# Altium PCB 12V_Buck.PcbDoc
Units mm, origin at the board's own origin, x right, y up, seen from the top; angles counter-clockwise.
Board outline 85.09 x 31.11 mm, 4 copper layers (Top Layer, GND, POWER, Bottom Layer), stack 0.603 mm thick; 63 components, 29 nets, 152 pads, 249 vias.
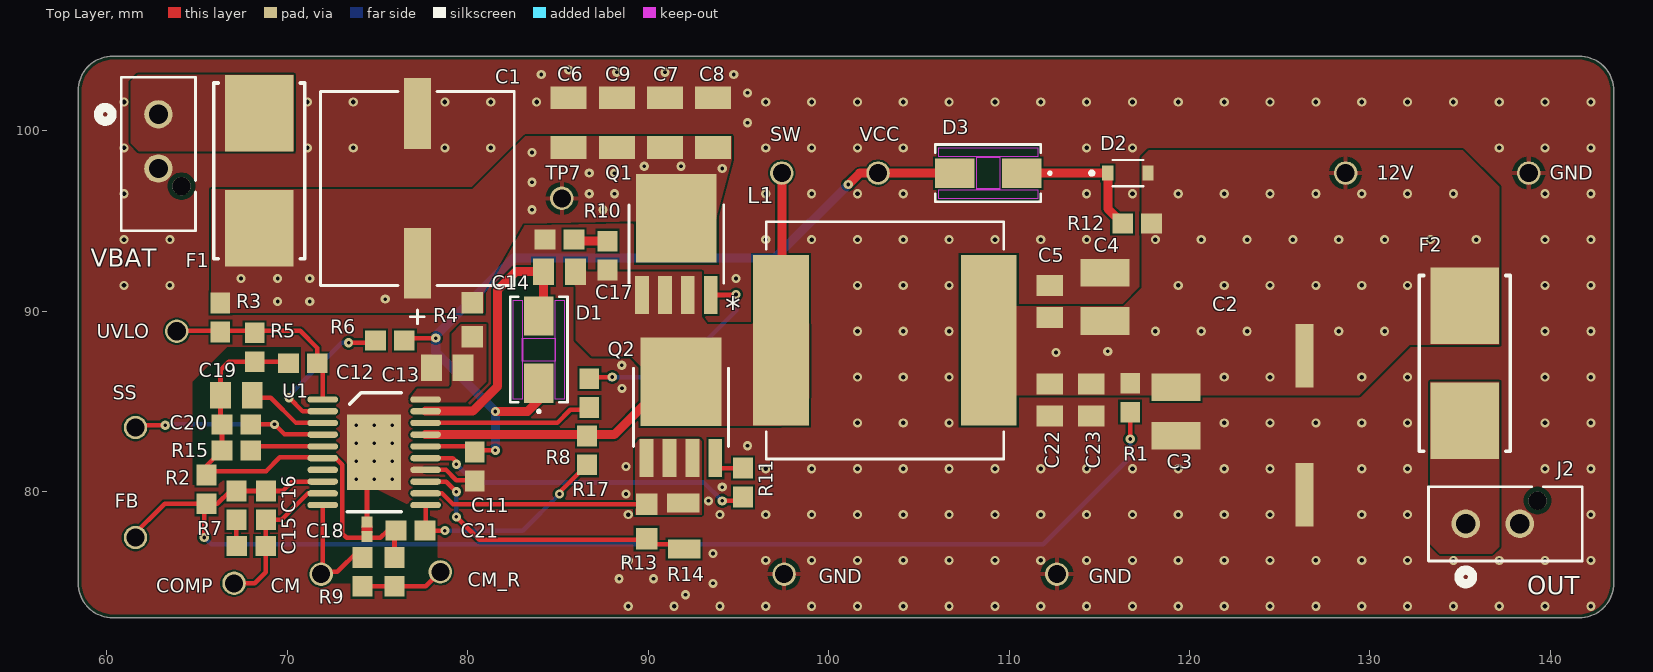
[diagram p0: Top Layer view]
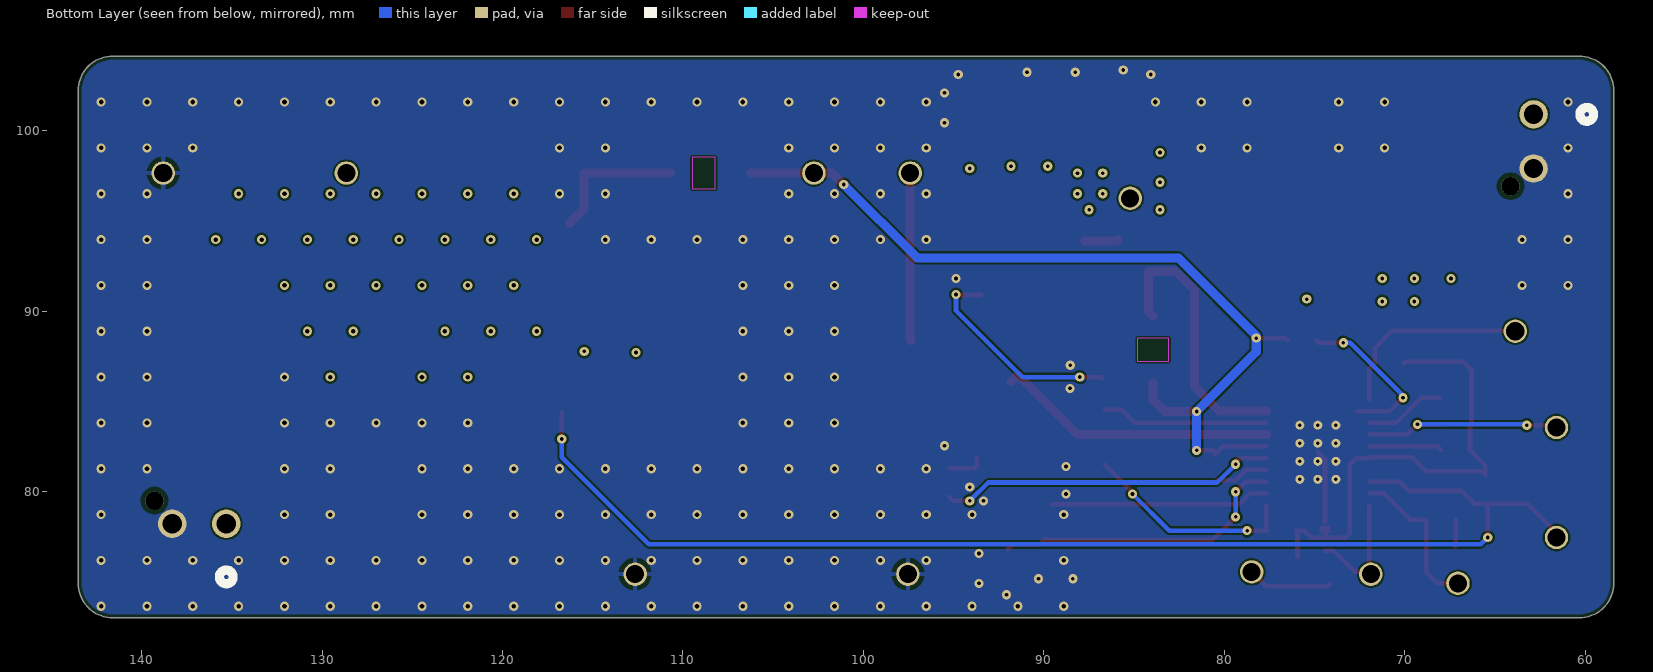
[diagram p1: Bottom Layer view, seen from below]
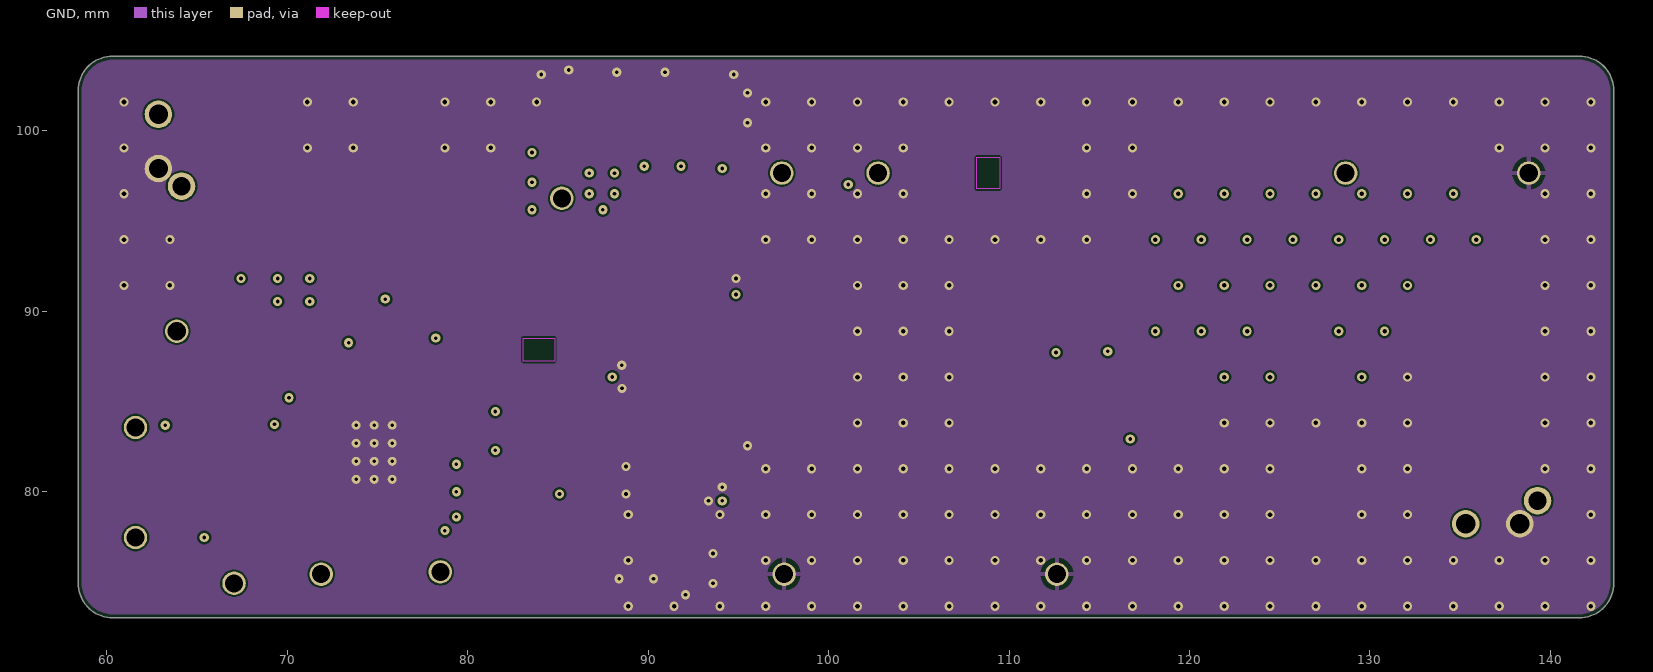
[diagram p2: GND]
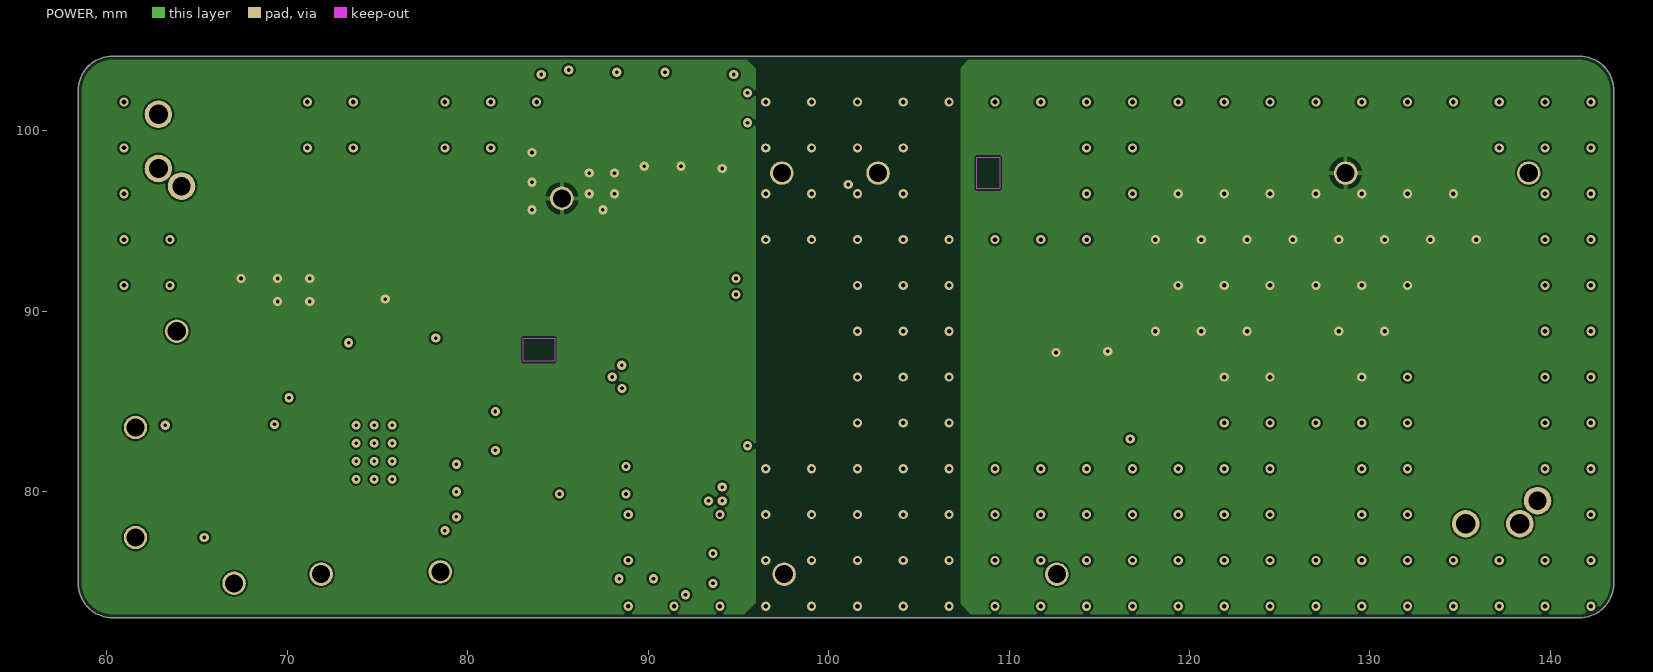
[diagram p3: POWER]
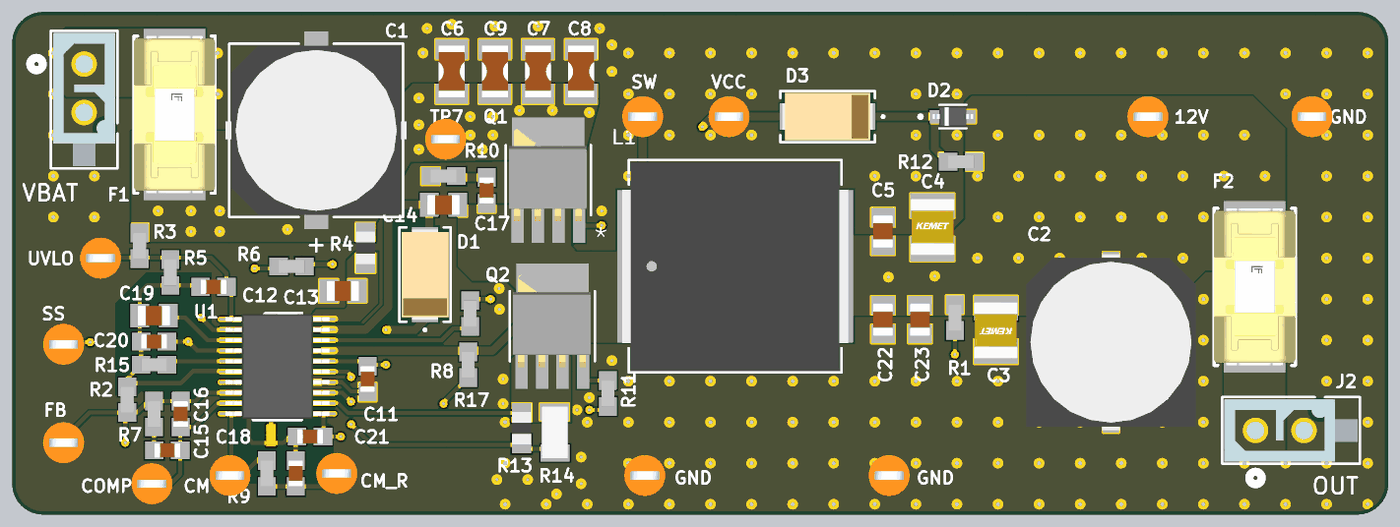
[diagram p4: 3D render of the assembled board from above, using the file's embedded part models]

## Layer stack, top to bottom
Top Solder: solder mask 0.0102, Solder Resist, Dk 3.5
Top Layer: signal copper 0.0356
Dielectric 2: prepreg 0.0711, PP-006, Dk 4.1
GND: signal copper 0.035
Dielectric 1: dielectric 0.32, FR-4, Dk 4.8
POWER: signal copper 0.035
Dielectric 3: prepreg 0.0711, PP-006, Dk 4.1
Bottom Layer: signal copper 0.0356
Bottom Solder: solder mask 0.0102, Solder Resist, Dk 3.5

## Board outline
60.325,73.025 cw(c60.325,74.93) 58.42,74.93 58.42,102.235 cw(c60.325,102.235) 60.325,104.14 141.605,104.14 cw(c141.605,102.235) 143.51,102.235 143.51,74.93 cw(c141.605,74.93) 141.605,73.025

## Design rules (kind name [scope] priority, off if disabled: settings)
BoardOutlineClearance [All] p1: gap=0.2 ignorepadtopadclearanceinfootprint=FALSE
Clearance "Stitching GND" [IsStitchingVia and InNet('GND') vs (IsVia and (Not IsStitchingVia)) Or IsPad] p1: gap=0.127 ignorepadtopadclearanceinfootprint=FALSE
Clearance [All] p2: gap=0.102 ignorepadtopadclearanceinfootprint=FALSE except(0.127: Arc-Via Track-Via SMDPad-Via THPad-Via Via-Via Via-Fill Via-Poly Via-Region Via-Text; 0.25: Arc-Hole Track-Hole SMDPad-Hole THPad-Hole Via-Hole Fill-Hole Poly-Hole Region-Hole Text-Hole)
ComponentClearance [All] p1: gap=0.102 collisioncheckmode=3 verticalgap=0.102 showdistances=TRUE
DiffPairsRouting [All] p1: maxlimit=0.102 minlimit=0.102 mostfreqgap=0.102 toplayer_minwidth=0.102 toplayer_maxwidth=1816.048 toplayer_prefwidth=0.102 midlayer1_minwidth=0.102 midlayer1_maxwidth=1816.048 midlayer1_prefwidth=0.102 midlayer2_minwidth=0.102 midlayer2_maxwidth=1816.048 midlayer2_prefwidth=0.102 bottomlayer_minwidth=0.102 bottomlayer_maxwidth=1816.048 bottomlayer_prefwidth=0.102 maxuncoupledlength=12.7
DiffPairsRouting USB [OnLayer('Top Layer') And InDifferentialPairClass('USB')] p2: maxlimit=0.127 minlimit=0.127 mostfreqgap=0.127 toplayer_maxgap=0.127 toplayer_prefgap=0.127 toplayer_minwidth=0.237 toplayer_maxwidth=0.237 toplayer_prefwidth=0.237 midlayer1_mingap=0.127 midlayer1_minwidth=0.089 midlayer1_maxwidth=0.089 midlayer1_prefwidth=0.089 midlayer2_mingap=0.127 midlayer2_minwidth=0.089 midlayer2_maxwidth=0.089 midlayer2_prefwidth=0.089 bottomlayer_maxgap=0.127 bottomlayer_prefgap=0.127 bottomlayer_minwidth=0.237 bottomlayer_maxwidth=0.237 bottomlayer_prefwidth=0.237 impedanceprofiledriven=TRUE impedanceprofileid={C8994B27-2D6B-4B4B-A1C4-DCAF0529D0FB} maxuncoupledlength=12.7
Height [All] p1: minheight=0 maxheight=1816.048 prefheight=12.7
HoleSize [All] p1: absolutevalues=TRUE maxlimit=6.3 minlimit=0.2 maxpercent=80.000 minpercent=20.000
HoleToHoleClearance [All] p1: gap=0.25 allowstackedmicrovias=FALSE
MinimumAnnularRing [All] p1: minimumring=0.076
MinimumSolderMaskSliver [All] p1: minsoldermaskwidth=0
PlaneClearance [All] p1: clearance=0.102
PlaneConnect PlaneConnectPowerPads [InPadClass('PowerPads')] p1: planeconnectstyle=Direct reliefexpansion=0.508 reliefentries=4 reliefconductorwidth=0.254 reliefairgap=0.254
PlaneConnect [All] p2: planeconnectstyle=Direct reliefexpansion=0.3 reliefentries=4 reliefconductorwidth=0.102 reliefairgap=0.102
PolygonConnect PolygonConnectPowerPads [All vs (InPadClass('PowerPads'))] p1: connectstyle=Direct reliefconductorwidth=0.254 reliefentries=4 polygonreliefangle="90 Angle" airgapwidth=0.254
PolygonConnect [All] p2: connectstyle=Direct reliefconductorwidth=0.102 reliefentries=4 polygonreliefangle="90 Angle" airgapwidth=0.102
RoutingVias [All] p1: holewidth=0.305 width=0.605 viastyle="Through Hole" minholewidth=0.3 minwidth=0.6 maxholewidth=0.405 maxwidth=0.705
SilkToSilkClearance [All] p1: silktosilkclearance=0
SilkToSolderMaskClearance [IsPad] p1: minsilkscreentomaskgap=0.102 clearancetoexposedcopper=TRUE
SolderMaskExpansion [All] p1: expansion=0.075 istentingtop=FALSE
SupplyNets "Schematic Supply Nets_3" [InNet('GND')] p1: voltage=0.000
SupplyNets "Schematic Supply Nets_1" [InNet('5V')] p2: voltage=0.000
SupplyNets "Schematic Supply Nets" [InNet('3V3')] p3: voltage=0.000
Width [All] p1: maxlimit=0.508 minlimit=0.102 preferedwidth=0.254 minimp=50.000000 maximp=50.000000 favimp=50.000000
20 further rules are at their usual default settings.

## Classes and differential pairs
component class External: C1 C2 C3 C4 C5 C6 C7 C8 C9 C22 C23 F1 F2 J2 VBAT
component class 12V_Buck: C11 C12 C13 C14 C15 C16 C17 C18 C19 C20 C21 CM COMP D1 D2 D3 FB L1 Q1 Q2 R1 R2 R3 R4 R5 R6 R7 R8 R9 R10 R11 R12 R13 R14 R15 R17 SS TP7 U1 UVLO

## Components (designator, comment, footprint, x,y, rotation, side; value= is the part's Value field where it differs from the comment)
12V "5003" TEST-POINT-0001 128.651,97.663 r0 top (schematic designator TP8)
C1 "UUX2A470MNL1GS" PCAP_10X10-ELECT_NCA 77.216,96.812 r270 top
C2 "50TZV220M10X10.5" ELEC-220U-0003 126.365,83.693 r180 top
C3 "GRM32ER61E226KE15L" CAP-1210 119.253,84.455 r270 top
C4 "GRM32ER61E226KE15L" CAP-1210 115.316,90.805 r90 top
C5 "CC0805KKX7R9BB105" CAP-0805 112.268,90.551 r90 top
C6 "C3216X7S2A335K160AB" CAP-1206 85.598,100.457 r90 top
C7 "C3216X7S2A335K160AB" CAP-1206 90.932,100.457 r90 top
C8 "C3216X7S2A335K160AB" CAP-1206 93.599,100.457 r90 top
C9 "C3216X7S2A335K160AB" CAP-1206 88.265,100.457 r90 top
C11 "UMK107AB7105KA-T" CAP-0603 80.391,81.407 r270 top
C12 "7447798111" CAP-0603 70.866,87.122 r0 top
C13 "KAM21KR72A474KL" CAP-0805 78.867,86.868 r180 top
C14 "KAM21KR72A474KL" CAP-0805 85.09,92.202 r0 top
C15 "C0603C223K3RAC7867" CAP-0603 68.008,76.994 r180 top
C16 "CC0603JRNPO9BN181" CAP-0603 68.834,79.248 r270 top
C17 "0603B471K101CT" CAP-0603 87.757,93.091 r90 top
C18 "C0603Y102K1RAC7867" CAP-0603 75.946,75.565 r90 top
C19 "KAM21KR72A474KL" CAP-0805 67.183,85.344 r180 top
C20 "CC0603KRX7R9BB104" CAP-0603 67.188,83.737 r180 top
C21 "C0603C821K5RACTU" CAP-0603 76.835,77.851 r180 top
C22 "CC0805KKX7R9BB105" CAP-0805 112.268,85.09 r270 top
C23 "CC0805KKX7R9BB105" CAP-0805 114.554,85.09 r270 top
CM "5003" TEST-POINT-0001 71.882,75.438 r0 top (schematic designator TP3)
CM_R "5003" TEST-POINT-0001 78.486,75.565 r0 top (schematic designator TP1)
COMP "5003" TEST-POINT-0001 67.056,74.93 r0 top (schematic designator TP9)
D1 "SS1200" SMA_DIO 83.947,87.884 r90 top
D2 "MM3Z5V6ST1G" "DIO_MM3Z3V0T1G - DUPLICATE" 116.586,97.663 r0 top
D3 "SS1200" SMA_DIO 108.839,97.663 r180 top
F1 "01550900M" FUSE-0001 68.453,97.79 r270 top
F2 "01550900M" FUSE-0001 135.255,87.122 r270 top
FB "5003" TEST-POINT-0001 61.595,77.47 r0 top (schematic designator TP2)
GND "5003" TEST-POINT-0001 138.798,97.663 r0 top (schematic designator TP13)
GND "5003" TEST-POINT-0001 97.536,75.438 r0 top (schematic designator TP12)
GND "5003" TEST-POINT-0001 112.649,75.438 r0 top (schematic designator TP11)
J2 "2068320201" CONN_2068320000-SD_02_MOL 135.303,78.232 r270 top
L1 "SRP1265WA-100M" IND_SRP1265_BRN 103.124,88.392 r0 top value=10uH
Q1 "PSMN5R5-100YSFX" LFPAK_SOT669_NEX 91.567,93.726 r0 top
Q2 "PSMN5R5-100YSFX" LFPAK_SOT669_NEX 91.821,84.684 r0 top
R1 "RC0603FR-0714KL" RES-0603 116.713,85.217 r270 top
R2 "RT0603FRE131KL" RES-0603 65.532,80.137 r90 top
R3 "RC0603FR-07100KL" RES-0603 66.294,89.662 r90 top
R4 "RC0805FR-073R9L" RES-0805 80.264,89.535 r90 top
R5 "RC0603FR-073K6L" RES-0603 68.199,88.011 r90 top
R6 "RMCF0603ZT0R00" RES-0603 75.692,88.392 r180 top
R7 "RC0603FR-0727K4L" RES-0603 67.183,79.248 r270 top
R8 "RC0603FR-072R49L" RES-0603 86.741,85.471 r90 top
R9 "ARG03FTC5761" RES-0603 74.168,75.565 r90 top
R10 "SG73P1JTTD100J" RES-0603 85.09,93.98 r180 top
R11 "RMCF0603ZT0R00" RES-0603 95.25,80.518 r90 top
R12 "RMCF0603ZT0R00" RES-0603 117.094,94.869 r180 top
R13 "PE0508FRE070R1L" RES-0805 89.916,78.359 r270 top
R14 "PE1206FKM470R008Z" RES-1206 91.948,78.105 r270 top
R15 "RC0603FR-0722K1L" RES-0603 67.183,82.296 r180 top
R17 "RC0603FR-07165KL" RES-0603 86.614,82.296 r90 top
RJ1 "Net Tie 12x8mil" SHORT06-FP 74.422,77.928 r90 top net-tie
SS "5003" TEST-POINT-0001 61.595,83.566 r0 top (schematic designator TP10)
SW "5003" TEST-POINT-0001 97.409,97.663 r0 top (schematic designator TP5)
TP7 "5003" TEST-POINT-0001 85.217,96.266 r0 top
U1 "LM5117PMHX/NOPB" IC-20-HTSSOP 74.894,81.743 r0 top
UVLO "5003" TEST-POINT-0001 63.881,88.9 r0 top (schematic designator TP6)
VBAT "2068320201" CONN_2068320000-SD_02_MOL 62.865,100.917 r180 top (schematic designator J1)
VCC "5003" TEST-POINT-0001 102.743,97.663 r0 top (schematic designator TP4)

## Footprints (in the part's own frame and the unit in brackets; to place one, negate y for a bottom-side part, rotate by r counter-clockwise, add the part's x,y. Pads: shape width x height; smd on the part's side, far side on the other; paste and mask are expansions set on the pad)
CAP-0603 [mm]
  rect 1.15x1.1 smd: 1(-0.8,0) 2(0.8,0)
  body extent -0.8,-0.45 0.8,0.45, height 0.8
CAP-0805 [mm]
  rect 1.16x1.47 smd: 1(-0.88,0) 2(0.88,0)
  body extent -1,-0.63 1,0.63, height 0.94
CAP-1206 [mm]
  rect 1.25x2 smd: 1(-1.375,0) 2(1.375,0)
  body extent -1.6,-0.8 1.6,0.8, height 1.5
CAP-1210 [mm]
  rect 1.53x2.72 smd: 1(-1.341,0) 2(1.341,0)
  body extent -1.72,-1.37 1.78,1.35, height 2.8
CONN_2068320000-SD_02_MOL [mil]
  round 62 / inner round 60 / far side round 62 hole 42 paste-99999 mask+0: 1(0,0) 2(0,118.11)
  round 40 / inner round 60 / far side round 40 hole 40 unplated paste-99999 mask+0: 3(-50.39,156.69)
  silkscreen extent -81,-81 131,254, body extent -76,-76 76,249, height 195
"DIO_MM3Z3V0T1G - DUPLICATE" [mm]
  rect 0.625x0.83 smd: 1(-1.112,0) 2(1.112,0)
  silkscreen extent -2.1,-0.73 0.85,0.73, body extent -1.25,-0.62 1.25,0.62, height 1
ELEC-220U-0003 [mm]
  rect 1x3.5 smd: 1(0,-3.85) 2(0,3.85)
  body extent -5.25,-5.45 5.25,5.45, height 10.54
FUSE-0001 [mil]
  rect 167x150 smd paste+0 mask+0: 1(-125.5,0) 2(125.5,0)
  silkscreen extent -192,-99 192,99, body extent -213,-103 213,103, height 10
IC-20-HTSSOP [mm]
  oval 1.7x0.35 smd paste-0.102 mask+0.051: 1(-2.925,3.375) 2(-2.925,2.725) 3(-2.925,2.075) 4(-2.925,1.425) 5(-2.925,0.775) 6(-2.925,0.125) 7(-2.925,-0.525) 8(-2.925,-1.175) 9(-2.925,-1.825) 10(-2.925,-2.475) 11(2.775,-2.475) 12(2.775,-1.825) 13(2.775,-1.175) 14(2.775,-0.525) 15(2.775,0.125) 16(2.775,0.775) 17(2.775,1.425) 18(2.775,2.075) 19(2.775,2.725) 20(2.775,3.375)
  rect 3x4.2 smd paste-0.102 mask+0.051: 21(-0.075,0.45)
  round 0.5 hole 0.2 paste-2539.97 mask+0.051: V(-1.075,-1.05) V(-1.075,-0.05) V(-1.075,0.95) V(-1.075,1.95) V(-0.075,-1.05) V(-0.075,-0.05) V(-0.075,0.95) V(-0.075,1.95) V(0.925,-1.05) V(0.925,-0.05) V(0.925,0.95) V(0.925,1.95)
  silkscreen extent -1.58,-2.85 1.42,3.75, body extent -3.29,-2.8 3.14,3.7, height 1
IND_SRP1265_BRN [mil]
  rect 122x372 smd paste+0 mask+0: 1(-226.5,0) 2(226.5,0)
  silkscreen extent -259,-259 259,259, body extent -276,-254 276,254, height 256
LFPAK_SOT669_NEX [mil]
  rect 30x83 smd paste+0 mask+0: 1(-75,-111) 2(-25,-111) 3(25,-111) 4(75,-111)
  rect 176x193 smd paste+0 mask+0: 5(0,56)
  silkscreen extent -104,-86 104,86, body extent -96,-116 94,125, height 29
PCAP_10X10-ELECT_NCA [mil]
  rect 154x59 smd paste+0 mask+0: 1(-163.5,0) 2(163.5,0)
  silkscreen extent -212,-212 295,212, body extent -206,-221 206,221, height 415
RES-0603 [mm]
  rect 1.15x1.1 smd: 1(-0.8,0) 2(0.8,0)
  body extent -0.8,-0.4 0.8,0.4, height 0.43
RES-0805 [mm]
  rect 1.2x1.2 smd: 1(-0.95,0) 2(0.95,0)
  body extent -1,-0.6 1,0.6, height 0.71
RES-1206 [mm]
  rect 1.05x1.8 smd: 1(-1.275,0) 2(1.275,0.043)
  body extent -1.6,-0.77 1.6,0.82, height 0.55
SHORT06-FP [mm]
  rect 0.6x0.6 smd paste-0.4 mask+0.102: 1(-0.4,0) 2(0.4,0)
  Top Layer region: -0.2,0.3 -0.2,-0.3 0.2,-0.3 0.2,0.3
SMA_DIO [mm]
  rect 2.18x1.63 smd paste+0 mask+0: 1(-1.857,0) 2(1.857,0)
  Top Layer keep-out region: -0.635,-0.917 -0.635,0.917 0.635,0.917 0.635,-0.917
  Top Layer keep-out region: -2.744,0.917 -2.744,1.409 2.744,1.409 2.744,0.917
  Top Layer keep-out region: -2.744,-1.409 -2.744,-0.917 2.744,-0.917 2.744,-1.409
  Keep-Out Layer region: -0.635,-0.866 -0.635,0.866 0.635,0.866 0.635,-0.866
  silkscreen extent -3.51,-1.59 2.92,1.59, body extent -2.8,-1.46 2.8,1.46, height 2.35
TEST-POINT-0001 [mm] "2024 miniature test point"
  round 1.3 hole 1: 1(0,0)
  body extent -1.27,-1.27 1.27,1.27, height 4.57

## Part data
12V CM CM_R COMP FB GND GND GND SS SW TP7 UVLO VCC: library part TEST-POINT-0001, "Oranange PC Test Point, Miniature Phoisphor Bronze Silver Plating Through Hole Mounting Type"
C1: library part CAP-47U-0005, "47 µF 100 V Aluminum Electrolytic Capacitors Radial, Can - SMD 2000 Hrs @ 105°C", Capacitance="47 uF", Voltage=100V, ComponentLink1Description=Datasheet, ComponentLink1URL=https://industrial.panasonic.com/cdbs/www-data/pdf/RDD0000/ABA0000C1234.pdf, Device Class=Electrolytic
C2: library part ELEC-220U-0003, "220 µF 50 V Aluminum Electrolytic Capacitors Radial, Can - SMD 2000 Hrs @ 105°C", Capacitance="220 uF", Voltage Rating=50V, Size=.406inx.406in*.413in
C3 C4: library part CAP-22U-0001, "CAP CER 22UF 25V X5R 1210", Capacitance=22uF, Voltage=25V, ComponentLink2Description=Datasheet, ComponentLink2URL=https://search.murata.co.jp/Ceramy/image/img/A01X/G101/ENG/GRM32ER61E226KE15-01A.pdf, Device Class=Ceramic, Size=1210
C5 C22 C23: library part CAP-1U-0001, "CAP CER 1UF 50V X7R 0805", Capacitance="1.0 uF", Voltage="50 V", ComponentLink2Description=Datasheet, ComponentLink2URL=https://www.yageo.com/upload/media/product/productsearch/datasheet/mlcc/UPY-GPHC_X7R_6.3V-to-250V_24.pdf, Device Class=Ceramic, Size=0805
C6 C7 C8 C9: library part CAP-3.3U-0001, "CAP CER 3.3UF 100V X7S 1206", Capacitance=3.3uF, Voltage=100V, ComponentLink1Description=Datasheet, ComponentLink1URL=https://www.yageo.com/upload/media/product/productsearch/datasheet/mlcc/UPY-GPHC_X7R_6.3V-to-250V_24.pdf, Device Class=Ceramic, Size=1206
C11: library part CAP-1U-0002, "1 µF ±10% 50V Ceramic Capacitor X7R 0603 (1608 Metric)", Capacitance="1 uF", Package Size=0603, Voltage=50V
C12: library part CAP-47P-0001, "47 pF ±5% 100V Ceramic Capacitor C0G, NP0 0603 (1608 Metric)", Capacitance="47 pF", Voltage Rating=100V
C13 C14 C19: library part CAP-0.47U-0001, "0.47 µF ±10% 100V Ceramic Capacitor X7R 0805 (2012 Metric)", Capacitance="0.47 uF", Package Size=0805, Temperature Coefficient=X7R, Tolerance="+/- 10%", Voltage=100V, Assembled?=No
C15: library part CAP-22N-0001, "0.022 µF ±10% 25V Ceramic Capacitor X7R 0603 (1608 Metric)", Capacitance="22 nF", Package Size=0603
C16: library part CAP-180P-0001, "180 pF ±5% 50V Ceramic Capacitor C0G, NP0 0603 (1608 Metric)", Capacitance="180 pF", Package Size=0805, Temperature Coefficient=X7R, Tolerance="+/- 10%", Voltage=50V, Assembled?=No
C17: library part CAP-470P-0001, "470 pF ±10% 100V Ceramic Capacitor X7R 0603 (1608 Metric)", Capacitance="470 pF", Package Size=0603, Tolerance=10%, Voltage=100V, Assembled?=No
C18: library part CAP-1N-0001, "1000 pF ±10% 100V Ceramic Capacitor X7R 0603 (1608 Metric)", Capacitance="1 nF", Voltage=100V
C20: library part CAP-100N-0001, "0.1 µF ±10% 50V Ceramic Capacitor X7R 0603 (1608 Metric)", Capacitance=100nF, Manufacturer=YAGEO, Manufacturer Part Number=CC0603KRX7R0BB104, Package Size=0603, Temperature Coefficient=X7R, Voltage Rating=50V, Assembled?=no
C21: library part CAP-820P-0001, "820 pF ±10% 50V Ceramic Capacitor X7R 0603 (1608 Metric)", Capacitance="820 pF", Voltage="50 V", ComponentLink1Description=Datasheet, ComponentLink1URL=https://www.yageo.com/upload/media/product/app/datasheet/mlcc/upy-np0x7r_mv_100-to-630v.pdf, Device Class=Ceramic, Size=0603
D1 D3: library part DIO-SCHOTTKY-0004, "DIODE SCHOTTKY 200V 1A SMA", Current Rating=1A, Reverse Voltage=200V, ComponentLink1Description=Datasheet, ComponentLink1URL=https://www.digikey.com/en/products/detail/mdd/ss1200/15911596
D2: library part TESTDIOZ
F1 F2: library part FUSE-0001, "FUSE BLOK CARTRIDGE 125V 10A SMD", Fuse Current=8A, Voltage Rating=125V, ComponentLink2Description=Datasheet, ComponentLink2URL=https://www.littelfuse.com/~/media/electronics/datasheets/fuses/littelfuse_fuse_154_154t_154l_154tl_datasheet.pdf.pdf
J2 VBAT: "Micro-Fit+ Vertical Header, Through Hole, 3.00mm Pitch, Dual Row, 2 Circuits, Tin (Sn) Plating, Glow-Wire Capable, Black, Tray", Manufacturer_Name="Molex Connector Corporation", Copyright="Copyright (C) 2025 Ultra Librarian. All rights reserved.", Manufacturer_Part_Number=2068320201, RefDes=RefDes, Type=Type
L1: library part IND-10U-0002, "10 µH Shielded Inductor 12 A 16.5mOhm Max Nonstandard", Current=12A, Package=None, Availability=Unavailable, MP=SRP1265A-100M, Price=None
Q1 Q2: library part NMOS-115A-0001, "N-Channel 100 V 115A (Tc) 238W (Tc) Surface Mount LFPAK56, Power-SO8", Drain Current=115A, Manufacturer_Part_Number=TPH2R506PL, RefDes=RefDes, Vdss=100V, Vgs="4V @ 1mA", Vgs (max)=20V
R1: library part RES-14K-0001, "14 kOhms ±1% 0.1W, 1/10W Chip Resistor 0603 (1608 Metric) Moisture Resistant Thick Film", Package Size=0603, Power="1/10 W", Resistance="14 kOhm", Tolerance="+/- 1%", Assembled?=No
R2: library part RES-1K-0002, "1 kOhms ±1% 0.1W, 1/10W Chip Resistor 0603 (1608 Metric) Thin Film", Manufacturer=YAGEO, Package Size=0603, Power Rating=1/10W, Resistance=1kOhm, Assembled?=no, Manufacturer Part Number=RT0603FRE131KL
R3: library part RES-100K-0003, "100 kOhms ±1% 0.1W, 1/10W Chip Resistor 0603 (1608 Metric) Moisture Resistant Thick Film", Package Size=0603, Power="1/10 W", Resistance="100 kOhm", Tolerance="+/- 1%", Assembled?=No
R4: library part RES-3.9-0001, "3.9 Ohms ±1% 0.125W, 1/8W Chip Resistor 0805 (2012 Metric) Moisture Resistant Thick Film", Parameter 1=3.9
R5: library part RES-3.6K-0001, "3.6 kOhms ±1% 0.1W, 1/10W Chip Resistor 0603 (1608 Metric) Moisture Resistant Thick Film", Power="1/10 W", Resistance="3.6 kOhms"
R6 R11 R12: library part RES-0-0001, "0 Ohms Jumper 0.1W, 1/10W Chip Resistor 0603 (1608 Metric) Automotive AEC-Q200 Thick Film", Package Size=0603, Power="1/10 W", Resistance="0 Ohm"
R7: library part RES-27.4K-0001, "27.4 kOhms ±1% 0.1W, 1/10W Chip Resistor 0603 (1608 Metric) Moisture Resistant Thick Film", JLC part number=C144778, Power="1/10 W", Resistance="27.4K Ohm", Assembled?=yes
R8: library part RES-2.49-0001, "2.49 Ohms ±1% 0.1W, 1/10W Chip Resistor 0603 (1608 Metric) Moisture Resistant Thick Film", Power="1/10 W", Resistance="2.49 Ohms"
R9: library part RES-5.76K-0001, "100mW Thin Film Resistor 75V ±25ppm/℃ ±1% -55℃~+155℃ 5.76kΩ 0603 Chip Resistor - Surface Mount ROHS", Manufacturer="Viking Tech", Package Size=0603, Power Rating=1/10W, Resistance=5.76kOhm, Assembled?=no, Manufacturer Part Number=ARG03FTC5761
R10: library part RES-10-0001, "10 Ohms ±5% 0.5W, 1/2W Chip Resistor 0603 (1608 Metric) Automotive AEC-Q200, Pulse Withstanding Thick Film", Manufacturer=Vishay, Manufacturer Part Number=RC0603FR-0710KP, Package Size=0603, Power Rating=1/2W, Resistance=10Ohm, Assembled?=no
R13: library part RES-0.1-0001, "100 mOhms ±1% 1.2W Chip Resistor Wide 0805 (2012 Metric), 0508 Automotive AEC-Q200, Current Sense Metal Element", Power=1.2W, Resistance=0.1
R14: library part RES-8mOhms-0001, "8 mOhms ±1% 1W Chip Resistor 1206 (3216 Metric) Current Sense Metal Foil", Power=1W, Resistance=8mOhms
R15: library part RES-22.1K-0001, "22.1 kOhms ±1% 0.1W, 1/10W Chip Resistor 0603 (1608 Metric) Moisture Resistant Thick Film", Package Size=0603, Power="1/10 W", Resistance="22.1 kOhm", Tolerance=1%, Assembled?=No
R17: library part RES-165K-0001, "165k Ohms ±1% 0.1W, 1/10W Chip Resistor 0603 (1608 Metric) Moisture Resistant Thick Film", Manufacturer=YAGEO, Package Size=0603, Power Rating=1/10W, Resistance="165kOhm +/-1%", Assembled?=no, Manufacturer Part Number=RC0603FR-07165KL
RJ1: library part CMP-009-00121-2, Max Operating Temperature=155°C, Min Operating Temperature=-55°C, Pins=2
U1: library part IC-BUCK-0011, "Buck Regulator Positive Output Step-Down DC-DC Controller IC 20-HTSSOP", Manufacturer="Texas Instruments", Manufacturer Part Number=TPS62933ODRLR, Assembled?=no, Type=Buck

## Via types
v1: diameter 0.508, hole 0.254, Top Layer to Bottom Layer, 192 vias
v2: diameter 0.508, hole 0.203, Top Layer to Bottom Layer, 57 vias

## Nets (pads, with @x,y where several pads share a name; then routed paths per layer and width w, separated by ;. In a path a pad name is that pad's centre, name@x,y a point inside that pad or via, vN(x,y) a via of type N, cw(c..) or ccw(c..) an arc to the next point about the centre after c; other vN are vias at no path point)
12V: 12V.1 C2.1 C3.1 C4.1 C5.1 C22.1 C23.1 D2.2 F2.1 L1.2 R1.1 R12.1
  other v1: 121.92,86.36 124.46,86.36 129.54,86.36 118.11,88.9 120.65,88.9 123.19,88.9 128.27,88.9 130.81,88.9 119.38,91.44 121.92,91.44 124.46,91.44 127,91.44 129.54,91.44 132.08,91.44 118.11,93.98 120.65,93.98 123.19,93.98 125.73,93.98 128.27,93.98 130.81,93.98 133.35,93.98 135.89,93.98 119.38,96.52 121.92,96.52 124.46,96.52 127,96.52 129.54,96.52 132.08,96.52 134.62,96.52
  other v2: 112.602,87.723 115.468,87.782
12V_FUSED: F2.2 J2.1
AGND: C12.1 C18.2 C19.2 C20.2 C21.2 R2.2 R5.1 R15.2 RJ1.1 U1.6 | length 27.1
  Top Layer w0.254: C12.1 69.977,87.211 R5.1 66.764,87.211 66.294,86.741 66.303,86.732 C19.2 66.303,83.822 C20.2 66.388,82.301 R15.2 65.532,81.445 R2.2 65.748,81.153 68.834,81.153 69.596,81.915 71.922,81.915 U1.6 72.691,81.868 73.054,81.505 73.054,77.695 73.298,77.451 75.165,77.451 75.565,77.851 C21.2 75.946,77.762 C18.2 ; RJ1.1@74.372,77.635 74.372,77.87
CM: CM.1 R9.2 U1.10 | length 6.5
  Top Layer w0.254: U1.10 71.969,75.732 72.136,75.565 72.771,75.565 73.952,76.746 R9.2@74.422,76.746
CM_R: C18.1 CM_R.1 R9.1 | length 4.7
  Top Layer w0.254: R9.1@74.168,74.892 74.295,74.765 C18.1 77.686,74.765 CM_R.1
COMP: C15.1 C16.2 COMP.1 U1.9 | length 8.7
  Top Layer w0.254: COMP.1 68.199,74.93 68.808,75.539 C15.1 68.808,78.422 C16.2 69.685,78.448 71.155,79.918 U1.9
CS: Q2.1 Q2.2 Q2.3 R13.1 R14.1 U1.12 | length 12.1
  Top Layer w0.254: U1.12 78.578,79.918 79.187,79.309 R13.1@89.535,79.309
DEMB: R6.2 U1.2 | length 9
  Top Layer w0.254: v2(70.104,85.217) 70.866,84.455 U1.2@72.638,84.455 ; v2(73.406,88.265) 74.765,88.265 R6.2
  Bottom Layer w0.254: v2(70.104,85.217) 70.104,85.344 73.025,88.265 v2(73.406,88.265)
FB: C16.1 FB.1 R1.2 R2.1 R7.1 U1.8 | length 69.7
  Top Layer w0.254: FB.1@61.348,77.477 63.208,79.337 R2.1 ; v2(65.405,77.47) 65.405,79.21 R2.1 ; U1.8 70.281,80.568 69.761,80.048 C16.1 R7.1 66.84,80.048 66.129,79.337 R2.1 ; v2(116.713,82.931) R1.2
  Bottom Layer w0.254: v2(65.405,77.47) 65.786,77.089 111.887,77.089 116.713,81.915 v2@116.713,82.804
GND: C1.1 C2.2 C3.2 C4.2 C5.2 C6.2 C7.2 C8.2 C9.2 C11.2 C13.2 C22.2 C23.2 GND.1 J2.2 R10.2 RJ1.2 U1.14 U1.21 U1.V VBAT.2 | length 7.2
  Top Layer w0.254: RJ1.2 74.422,78.613 74.422,81.796 U1.21 ; U1.14 78.802,81.218 79.375,80.645 80.353,80.645 C11.2 C11.2@80.518,80.48
  other v1: 88.9,73.66 91.44,73.66 93.98,73.66 96.52,73.66 99.06,73.66 101.6,73.66 104.14,73.66 106.68,73.66 109.22,73.66 111.76,73.66 114.3,73.66 116.84,73.66 119.38,73.66 121.92,73.66 124.46,73.66 127,73.66 129.54,73.66 132.08,73.66 134.62,73.66 137.16,73.66 139.7,73.66 142.24,73.66 88.9,76.2 96.52,76.2 99.06,76.2 101.6,76.2 104.14,76.2 106.68,76.2 109.22,76.2 111.76,76.2 114.3,76.2 116.84,76.2 119.38,76.2 121.92,76.2 124.46,76.2 127,76.2 129.54,76.2 132.08,76.2 134.62,76.2 137.16,76.2 139.7,76.2 142.24,76.2 88.9,78.74 93.98,78.74 96.52,78.74 99.06,78.74 101.6,78.74 104.14,78.74 106.68,78.74 109.22,78.74 111.76,78.74 114.3,78.74 116.84,78.74 119.38,78.74 121.92,78.74 124.46,78.74 129.54,78.74 132.08,78.74 142.24,78.74 96.52,81.28 99.06,81.28 101.6,81.28 104.14,81.28 106.68,81.28 109.22,81.28 111.76,81.28 114.3,81.28 116.84,81.28 119.38,81.28 121.92,81.28 124.46,81.28 129.54,81.28 132.08,81.28 139.7,81.28 142.24,81.28 101.6,83.82 104.14,83.82 106.68,83.82 121.92,83.82 124.46,83.82 127,83.82 129.54,83.82 132.08,83.82 139.7,83.82 142.24,83.82 101.6,86.36 104.14,86.36 106.68,86.36 132.08,86.36 139.7,86.36 142.24,86.36 101.6,88.9 104.14,88.9 106.68,88.9 139.7,88.9 142.24,88.9 60.96,91.44 63.5,91.44 101.6,91.44 104.14,91.44 106.68,91.44 139.7,91.44 142.24,91.44 60.96,93.98 63.5,93.98 96.52,93.98 99.06,93.98 101.6,93.98 104.14,93.98 106.68,93.98 109.22,93.98 111.76,93.98 114.3,93.98 139.7,93.98 142.24,93.98 60.96,96.52 96.52,96.52 99.06,96.52 101.6,96.52 104.14,96.52 114.3,96.52 116.84,96.52 139.7,96.52 142.24,96.52 60.96,99.06 71.12,99.06 73.66,99.06 78.74,99.06 81.28,99.06 96.52,99.06 99.06,99.06 101.6,99.06 104.14,99.06 114.3,99.06 116.84,99.06 137.16,99.06 139.7,99.06 142.24,99.06 60.96,101.6 71.12,101.6 73.66,101.6 78.74,101.6 81.28,101.6 83.82,101.6 96.52,101.6 99.06,101.6 101.6,101.6 104.14,101.6 106.68,101.6 109.22,101.6 111.76,101.6 114.3,101.6 116.84,101.6 119.38,101.6 121.92,101.6 124.46,101.6 127,101.6 129.54,101.6 132.08,101.6 134.62,101.6 137.16,101.6 139.7,101.6 142.24,101.6
  other v2: 92.075,74.295 93.599,74.93 88.392,75.184 90.297,75.184 93.599,76.581 93.345,79.502 88.773,79.883 94.107,80.264 88.773,81.407 95.504,82.55 88.552,85.734 88.535,87.019 94.869,91.821 95.504,100.457 95.504,102.108 84.074,103.124 94.742,103.124 88.265,103.251 90.932,103.251 85.598,103.378
HB: C14.1 D1.2 U1.19 | length 15.4
  Top Layer w0.5: U1.19 80.277,84.468 81.661,85.852 81.661,91.186 82.677,92.202 C14.1 84.21,90.004 D1.2
HO: R8.1 U1.18 | length 9.2
  Top Layer w0.254: U1.18 84.961,83.818 85.687,84.544 R8.1@86.614,84.544
HO_R: Q1.4 R8.2 | length 12.1
  Top Layer w0.254: R8.2 86.83,86.36 v2(88.011,86.36) ; Q1.4 94.844,90.907 v2(94.869,90.932)
  Bottom Layer w0.254: v2@87.884,86.233 v2@88.011,86.233 ; v2(88.011,86.36) 91.186,86.36 94.869,90.043 v2(94.869,90.932)
LO: R11.1 U1.15 | length 18.7
  Top Layer w0.254: U1.15 79.168,81.868 79.375,81.661 v2(79.375,81.534) ; v2(94.107,79.502) 95.034,79.502 R11.1
  Bottom Layer w0.254: v2(79.375,81.534) 80.391,80.518 93.091,80.518 v2@94.07,79.539
LO_R: Q2.4 R11.2 | length 2
  Top Layer w0.254: Q2.4 93.726,81.407 93.815,81.318 R11.2
NetC15_2: C15.2 R7.2 | length 1.5
  Top Layer w0.254: R7.2 67.183,77.019 C15.2
NetC17_2: C17.2 R10.1 | length 1.9
  Top Layer w0.5: R10.1 85.979,93.891 C17.2
NetD2_1: D2.1 D3.1 R12.2 | length 7.9
  Top Layer w0.5: D3.1 D2.1 115.474,95.689 R12.2
NetR13_2: R13.2 R14.2 U1.13 | length 16.7
  Top Layer w0.254: U1.13 78.817,80.568 v2(79.375,80.01) ; v2(79.375,78.613) 80.645,77.343 89.85,77.343 R13.2 90.236,77.089 91.732,77.089 R14.2
  Bottom Layer w0.254: v2(79.375,78.613) v2(79.375,80.01)
RAMP: C21.1 R17.1 U1.11 | length 12
  Top Layer w0.254: C21.1 77.669,77.851 v2(78.74,77.851) ; C21.1@77.669,77.978 U1.11 ; v2(85.09,79.883) 85.09,79.972 R17.1
  Bottom Layer w0.254: v2(78.74,77.851) 83.058,77.851 v2(85.09,79.883) v2@85.217,79.883
RES: C19.1 U1.3 | length 4.5
  Top Layer w0.254: C19.1@68.063,85.217 69.088,85.217 70.487,83.818 U1.3
RT: R15.1 U1.5 | length 4.1
  Top Layer w0.254: R15.1 68.205,82.518 U1.5
SS: C20.1 SS.1 U1.4 | length 12
  Top Layer w0.254: SS.1 61.722,83.693 v2(63.246,83.693) ; C20.1 v2(69.298,83.737) 69.85,83.185 71.952,83.185 U1.4
  Bottom Layer w0.254: v2(63.246,83.693) 63.29,83.737 v2(69.298,83.737)
SW: C14.2 C17.1 L1.1 Q1.1 Q1.2 Q1.3 Q2.5 R17.2 SW.1 U1.17 | length 24.7
  Top Layer w0.5: U1.17 86.614,83.168 88.121,83.168 91.44,86.487 Q2.5 ; L1.1 97.409,88.43 SW.1@97.409,97.409
UVLO: C12.2 R3.1 R5.2 U1.1 UVLO.1 | length 11.2
  Top Layer w0.254: UVLO.1@64.008,89.281 64.364,88.925 66.294,88.925 68.199,88.925 68.705,88.925 70.714,88.925 71.666,87.973 C12.2 71.969,86.819 U1.1
VBAT: F1.1 VBAT.1
VBAT_FUSED: C1.2 C6.1 C7.1 C8.1 C9.1 F1.2 Q1.5 R3.2 R4.2 TP7.1
  other v2: 69.469,90.551 71.247,90.551 75.438,90.678 67.437,91.821 69.469,91.821 71.247,91.821 83.566,95.631 87.492,95.631 86.741,96.52 88.138,96.52 83.566,97.155 86.741,97.663 88.138,97.663 94.107,97.917 89.789,98.044 91.821,98.044 83.566,98.806
VCC: C11.1 D1.1 D3.2 R6.1 U1.16 VCC.1 | length 48.9
  Top Layer w0.254: R6.1 76.619,88.519 v2(78.232,88.519) ; U1.16 80.08,82.518 C11.1 C11.1@80.518,82.08 ; C11.1@80.518,82.207 80.607,82.296 v2(81.534,82.296)
  Top Layer w0.5: v2(81.534,84.455) 81.538,84.451 83.308,84.451 83.947,85.09 D1.1 ; v2(101.092,97.028) 101.727,97.663 VCC.1 D3.2@106.22,97.663
  Bottom Layer w0.5: v2(81.534,82.296) v2(81.534,84.455) 78.232,87.757 v2(78.232,88.519) 78.232,88.646 82.55,92.964 97.028,92.964 v2(101.092,97.028)
VIN: C13.1 R4.1 U1.20
pads on no net: J2.3 U1.7 VBAT.3

## Polygon pours and split planes (outlines as drawn)
GND on Top Layer "GND_L01_P008" (solid, remove dead copper, pour order 8): 58.42,104.14 58.42,73.025 143.51,73.025 143.51,104.14
12V on Top Layer "12V_L01_P007" (solid, pour order 7): 107.569,90.297 116.332,90.297 117.348,91.313 117.348,98.552 117.729,98.933 135.128,98.933 137.16,96.901 137.16,88.138 132.207,88.138 129.413,85.344 107.569,85.344
SW on Top Layer "SW_L01_P014" (solid, pour order 14): 95.123,89.281 95.885,90.043 95.885,93.091 98.933,93.091 98.933,83.693 94.996,83.693 94.996,89.281
SW on Top Layer "SW_L01_P013" (solid, pour order 13): 85.471,92.837 85.471,91.44 86.233,90.678 88.265,90.678 88.265,92.837
VBAT_FUSED on Top Layer "VBAT_FUSED_L01_P001" (solid, pour order 1): 65.786,96.774 65.786,90.97 66.84,89.916 72.136,89.916 79.629,89.916 80.899,89.916 80.899,91.059 83.058,94.869 93.735,95.07 94.647,98.399 94.647,99.695 83.185,99.695 80.264,96.774
CS on Top Layer "CS_L01_P006" (solid, pour order 6): 89.535,82.931 89.281,82.677 89.281,78.74 92.964,78.74 92.964,82.804 92.837,82.931
SW on Top Layer "SW_L01_P000" (solid, pour order 0): 85.979,92.202 85.979,88.392 86.868,87.503 89.027,87.503 89.916,86.614 89.916,83.671 97.387,83.671 98.933,85.217 98.933,89.291 93.289,89.291 92.964,89.691 92.964,92.202 89.662,92.202
VIN on Top Layer "VIN_L01_P005" (solid, pour order 5): 79.629,89.281 79.115,88.767 79.127,85.904 78.989,85.725 77.216,85.725 76.835,85.254 76.835,84.963 79.883,84.963 81.026,86.106 81.026,89.281
VBAT on Top Layer "VBAT_L01_P004" (solid, pour order 4): 70.358,103.124 61.722,103.124 61.341,102.743 61.341,99.314 61.777,98.878 70.358,98.878
12V_FUSED on Top Layer "12V_FUSED_L01_P003" (solid, pour order 3): 137.16,86.106 133.35,86.106 133.35,77.089 133.858,76.581 136.779,76.581 137.16,76.962
GND on GND "GND_L02_P012" (solid, pour order 12): 58.42,104.14 58.42,73.025 143.51,73.025 143.51,104.14
GND on Bottom Layer "GND_L04_P011" (solid, pour order 11): 58.42,104.14 58.42,73.025 143.51,73.025 143.51,104.14
VBAT_FUSED on POWER "VBAT_FUSED_L03_P015" (solid, pour order 15): 58.361,104.089 58.361,72.974 95.064,72.974 95.953,73.863 95.953,103.454 95.318,104.089
12V on POWER "12V_L03_P016" (solid, pour order 16): 143.51,104.14 107.95,104.14 107.315,103.505 107.315,73.787 108.077,73.025 143.51,73.025

## Other copper
Top Layer:
  pour cut-out: 71.882,80.137 71.882,74.93 77.089,74.93 78.312,76.153 78.312,78.486 74.93,80.137
  pour cut-out: 70.739,88.011 66.675,88.011 64.77,86.106 64.77,80.391 66.167,80.391 66.548,80.772 70.231,80.772 71.12,81.661 70.739,82.042

## Silkscreen, mask and mechanical layers (free items; w line width, h text height)
Top Overlay:
  text "OUT" at 138.709,74.32 h1

## Text inside footprints (layer, text, board x,y; h text height)
Q1: Mechanical 13 "*" at 89.344,91.3 h1.27; Top Overlay "*" at 94.288,89.528 h1.27
Q2: Mechanical 13 "*" at 89.599,82.258 h1.27